# Altium PCB PCB2.PcbDoc (part 2 of 2)
Units mil, origin at the board's own origin, x right, y up, seen from the top; angles counter-clockwise.
Board outline 35165 x 15285 mil, 2 copper layers (Top Layer, Bottom Layer); 223 components, 120 nets, 681 pads, 228 vias.
Unrouted connection lines stored in the file: 6.
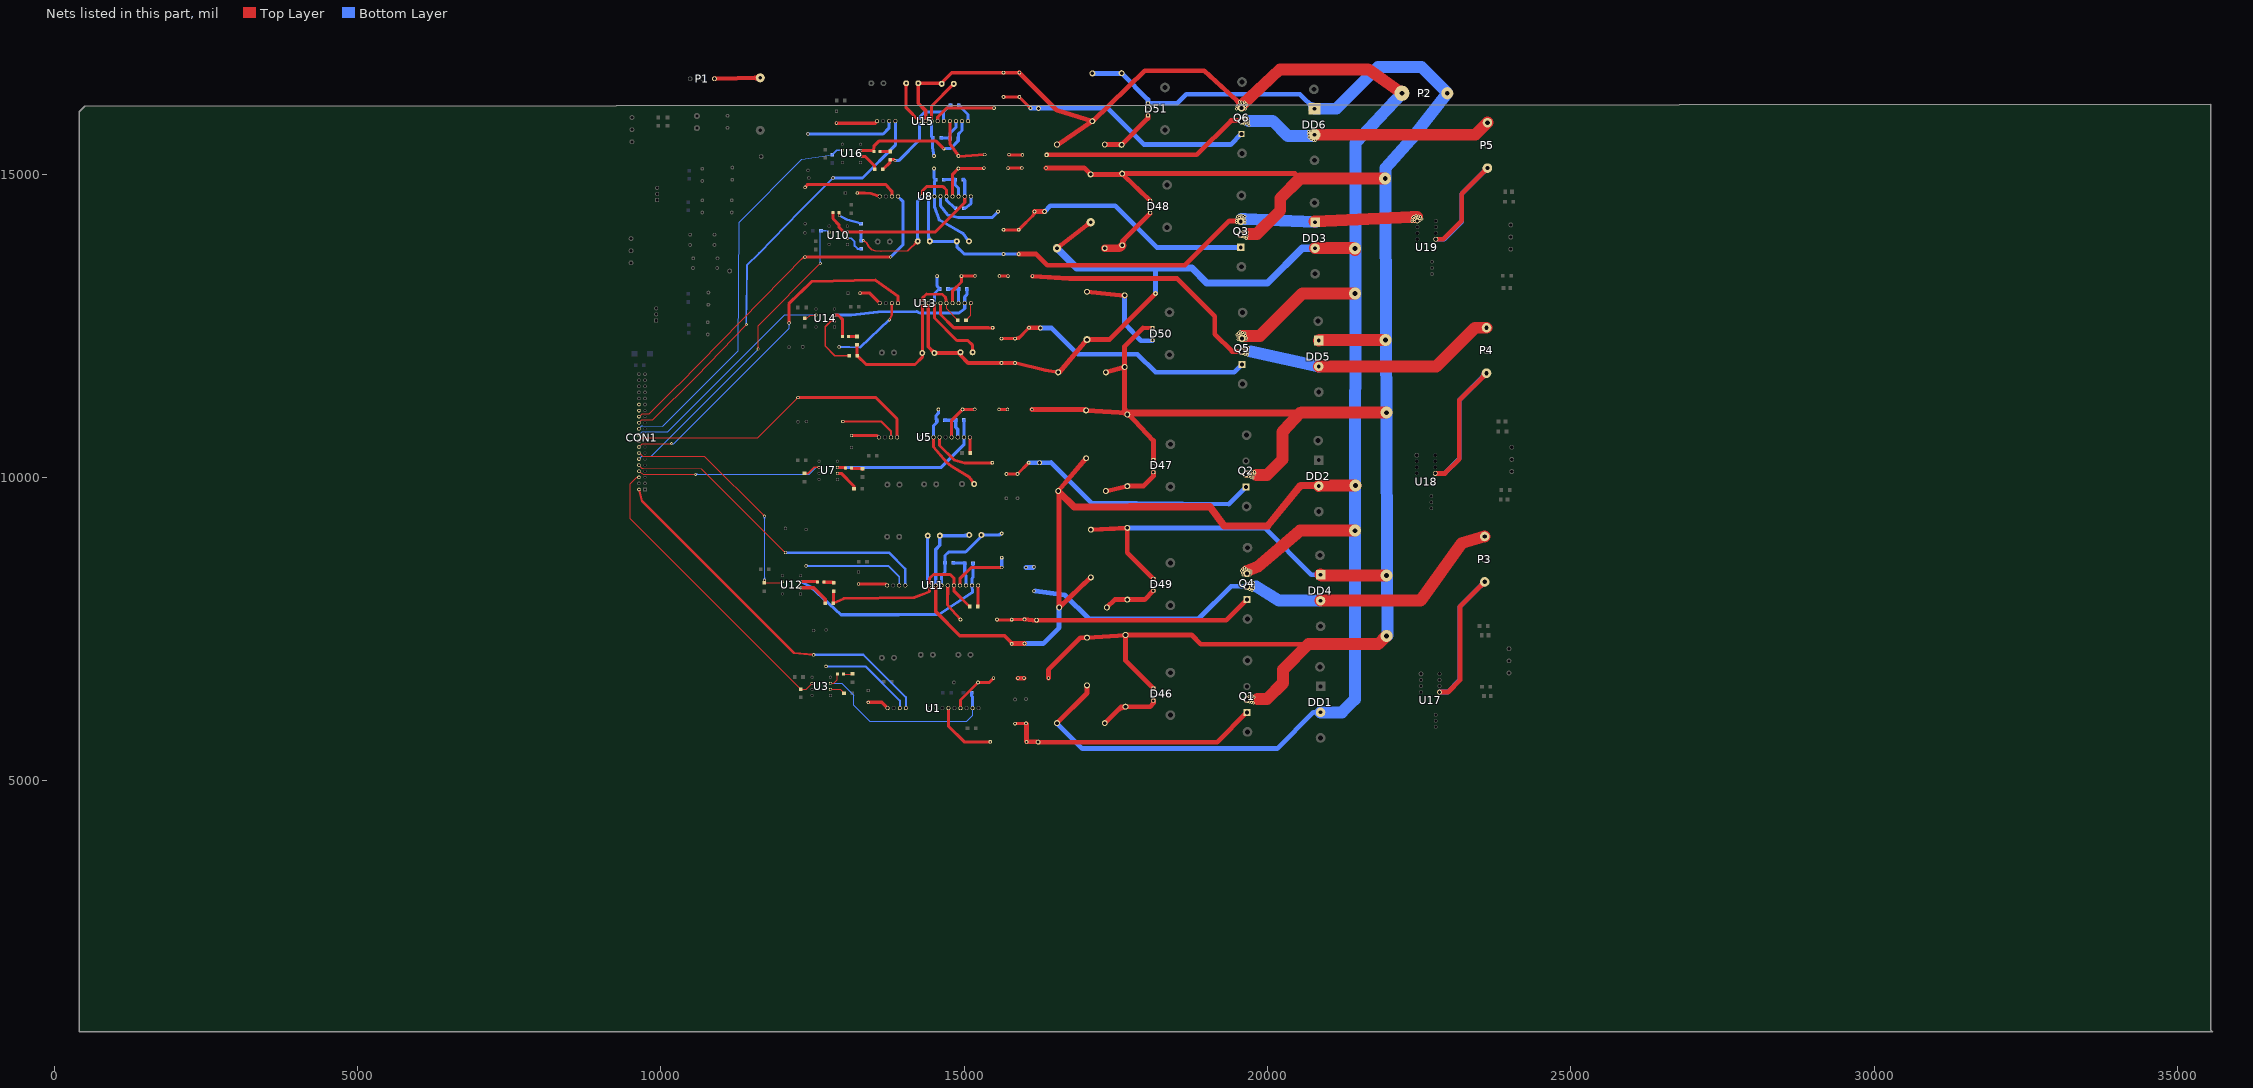
[diagram p2: the nets of this part, all layers, seen from the top]

## Via types
v1: diameter 50, hole 11.81, Top Layer to Bottom Layer, 181 vias
v2: diameter 50, hole 28, Top Layer to Bottom Layer, 18 vias
v3: diameter 70, hole 28, Top Layer to Bottom Layer, 12 vias
v4: diameter 196.85, hole 78.74, Top Layer to Bottom Layer, 9 vias
v5: diameter 157.48, hole 137.8, Top Layer to Bottom Layer, 4 vias
v6: diameter 50, hole 23.62, Top Layer to Bottom Layer, 2 vias
v7: diameter 78.74, hole 28, Top Layer to Bottom Layer, 1 vias
v8: diameter 86.61, hole 28, Top Layer to Bottom Layer, 1 vias

## Nets (pads, with @x,y where several pads share a name; then routed paths per layer and width w, separated by ;. In a path a pad name is that pad's centre, name@x,y a point inside that pad or via, vN(x,y) a via of type N, cw(c..) or ccw(c..) an arc to the next point about the centre after c; other vN are vias at no path point) (continued)
NetC22_2: C22.2 C24.1 D12.A U5.10 | length 1580.6
  Top Layer w50: U5.10@14495,10665 14495,10505 14710,10250 14790,10190 15085,10010 C22.2@15165,9895
  Bottom Layer w50: U5.10@14495,10665 14495,10855 14550,10910 C24.1@14550,10945 14540,10955 14540,11025 14575,11060 D12.A@14575,11125
NetC23_2: C23.2 U5.16 | length 262.1
  Top Layer w50: U5.16@15095,10665 15095,10410 C23.2@15100,10405
NetC24_2: C24.2 R16.2 U5.14 | length 476.6
  Bottom Layer w60: C24.2@14685,10945 14855,10945 R16.2@14860,10950 14860,10830 14895,10795 U5.14@14895,10665
NetC35_1: C35.1 C37.1 R27.2 R28.2 U8.8 U8.12 | length 3059.8
  Top Layer w30: v2(13345,13905) 13395,13870 13415,13830 13430.79,13805.12 13480.12,13755.79 13530,13740 13630,13730 14070,13740 C35.1@14235,13895 ; C35.1@14200.8,13896.07 cw(c14118.25,13898.65) 14174.8,13838.45 cw(c14231.35,13778.25) C35.1@14233.93,13860.8
  Top Layer w50: U8.8@14310,14635 14310,14725 14380,14795 14655,14795 14710,14740 U8.12@14710,14635
  Bottom Layer w50: R27.2@13300,14050 13300,13910 R28.2@13305,13905 ; C35.1@14217.88,13912.12 ccw(c14176.55,13953.45) 14235,13953.45 ccw(c14293.45,13953.45) C35.1@14252.12,13912.12 ; C35.1@14235,13895 14235,14560 U8.8@14310,14635 ; U8.12@14710,14635 14710,14570 C37.1@14845,14445
NetC35_2: C35.2 C36.1 D22.1 DD3.C Q3.3 R23.1 U8.9 U19.1 | length 9692.5
  Top Layer w50: Q3.3@19553.35,14230 Q3.3@19560,14223.35 ; DD3.C@20775,14220 DD3.C@20785,14210
  Top Layer w78.74: R23.1@15900,13685 16185,13685 16370,13500 18640,13500 19370,14230 Q3.3@19553.35,14230
  Top Layer w196.85: DD3.C@20775,14220 20784.51,14220.45 22376.41,14295.81 22377.83,14295.87 22389.46,14296.42 22410.36,14297.41 22416.32,14297.7 22417.98,14297.77 22439.11,14298.77 22450.98,14299.34 v1@22465,14300
  Bottom Layer w50: 14410,14013.81 ccw(c14553.81,14013.81) 14452.12,13912.12 ccw(c14493.45,13953.45) 14493.45,13895 ccw(c14493.45,13836.55) C35.2@14452.12,13877.88 ; U8.9@14410,14635 14410,13920 C35.2@14435,13895 C36.1@14880,13895 14880,13805 15000,13685 D22.1@15650,13685 R23.1@15890,13685 ; C36.1@14862.88,13912.12 cw(c14821.55,13953.45) 14821.55,13895 cw(c14821.55,13836.55) 14862.88,13877.88 cw(c14821.55,13836.55) 14880,13836.55 cw(c14938.45,13836.55) C36.1@14897.12,13877.88
  Bottom Layer w196.85: Q3.3@19575,14265 19597.45,14263.98 19609.25,14263.44 19623.08,14262.81 19630.93,14262.46 19632.84,14262.37 DD3.C@20785,14210
  other v1: 19630,14200 19490,14205 22380,14220 22420,14220 22515,14235 19490,14240 19630,14242.05 22380,14250 22420,14255 22545,14265 19500,14270 22510,14270 19610,14280 22440,14280 22390,14285 22480,14285 19535,14290 19575,14295 19505,14300 22525,14300 19625,14305 22410,14305 22490,14315 19530,14320 19600,14320 22450,14320 19565,14330
NetC36_2: C36.2 C38.1 D23.A U8.10 | length 1492.5
  Bottom Layer w50: D23.A@14505,15095 14505,14935 C38.1@14530,14910 14510,14890 U8.10@14510,14635 14510,14465 14590,14250 14975,14030 C36.2@15080,13895
NetC37_2: C37.2 U8.16 | length 252
  Bottom Layer w50: C37.2@15005,14435 15110,14515 U8.16@15110,14635
NetC38_2: C38.2 R29.2 U8.14 | length 491.1
  Bottom Layer w50: C38.2@14665,14910 14835,14910 R29.2@14850,14925 ; R29.2@14850,14910 14850,14825 14910,14765 U8.14@14910,14635
NetC44_1: C44.1 C46.1 R35.2 R36.2 U11.8 U11.12 | length 3994.2
  Top Layer w50: R35.2@12850,8130 12850,7935 R36.2@12845,7930 13015,8005 14180,8025 14430,8120 U11.8@14430,8225 14430,8340 14495,8405 14770,8405 14830,8345 U11.12@14830,8225 14830,8135 C46.1@15090,7875
  Bottom Layer w50: C44.1@14382.88,9027.88 cw(c14341.55,8986.55) 14400,8986.55 cw(c14458.45,8986.55) C44.1@14417.12,9027.88 ; C44.1@14400,9045 14400,8255 U11.8@14430,8225
NetC44_2: C44.2 C45.1 C51.2 C52.1 C58.2 C59.1 C63.1 C64.1 C65.1 C68.1 C69.1 C70.1 C71.1 C72.1 C73.1 C74.1 C75.1 C76.1 D29.1 D36.1 D42.1 DD1.A DD2.A DD3.A P2.3 Q4.3 Q5.3 Q6.3 R32.1 R40.1 R47.1 U11.9 U13.9 U15.9 | length 57119.9
  Top Layer w60: U15.9@14365,15875 14365,16050 14245,16170 C58.2@14245,16500 14620,16500 C59.1@14630,16490 14630,16510 14795,16675 D42.1@15650,16675 R47.1@15910,16675 ; U13.9@14410,12875 14410,12155 C51.2@14510,12055 14930,12055 C52.1@14940,12065 14940,12015 15065,11890 R40.1@15615,11890 D36.1@15840,11890 16340,11770 C71.1@16550,11735 ; U11.9@14530,8225 14535,7975 14535,7790 14930,7395 15665,7395 15785,7275 R32.1@15785,7260 R32.1@15790,7265 ; 14869.47,12055 ccw(c14869.47,12135.53) C52.1@14926.41,12078.59 ; C73.1@17115,15875 C73.1@17123.75,15875
  Top Layer w78.74: R32.1@15790,7265 D29.1@15995,7265 ; R47.1@15910,16675 16530,16055 C73.1@17115,15875 C74.1@16540,15480 ; C64.1@16530,5955 17025,6450 C63.1@17025,6575 ; C68.1@16530,13780 C76.1@17085,14210 ; C68.1@16533.72,13809.29 ccw(c16542.69,13880.01) 16586.35,13823.66 ccw(c16630.01,13767.31) C68.1@16559.29,13776.28 ; C75.1@16543.04,9773.04 cw(c16490.02,9720.02) 16565,9720.02 ; C71.1@16549.16,11744.81 ccw(c16542.69,11820.51) 16600.8,11771.55 ; C71.1@16570,11735 C72.1@17025,12275 17395,12275 v8(18155,13035) ; C65.1@17010,10320 C75.1@16550,9780 16565,9765 C70.1@16565,7860 C69.1@17090,8355 ; C76.1@17055.71,14213.72 cw(c16984.99,14222.69) 17028.65,14166.34 cw(c17072.31,14109.99) C76.1@17081.28,14180.71 ; C73.1@17123.75,15875 17980,16705 18958.35,16705 Q6.3@19580,16140 ; 17720,9515 17725,9520 ; 19487.19,16224.35 cw(c19358.97,16083.27) Q6.3@19549.39,16092.36
  Top Layer w118.11: C75.1@16565,9765 16815,9515 17720,9515 ; 17725,9520 19055,9520 19285,9205 20005,9205 20545,9870 DD2.A@20853.35,9870
  Top Layer w196.85: Q6.3@19580,16140 20206.65,16730 21660,16730 22215.98,16336.39 P2.3@22225,16330 ; Q5.3@19595,12335 19875,12335 20575,13035 v4(21440,13035) ; Q4.3@19660,8460 19845,8535 20535,9125 v4(21440,9125) ; DD3.A@20785,13781.65 21413.35,13781.65 21440,13755 v4(21440,13775) ; DD2.A@20845,9861.65 20853.35,9870 v4(21450,9870)
  Bottom Layer w60: U11.9@14530,8225 14530,8815 14600,8885 C44.2@14600,9045 15075,9045 C45.1@15085,9055 ; 15014.47,9045 ccw(c15014.47,9125.53) C45.1@15071.41,9068.59
  Bottom Layer w78.74: D29.1@15995,7265 16305,7265 16565,7525 C70.1@16565,7860 ; C64.1@16530,5955 16950,5535 20160,5535 20756.65,6131.65 DD1.A@20875,6131.65 ; v8(18155,13035) 18155,13455 ; DD1.A@20847.16,6103.81 ccw(c20779.95,6036.61) 20779.95,6131.65 ccw(c20779.95,6226.7) DD1.A@20847.16,6159.49
  Bottom Layer w118.11: C68.1@16530,13780 16855,13455 18155,13455 18755,13455 19000,13210 20000,13210 20571.65,13781.65 DD3.A@20785,13781.65
  Bottom Layer w196.85: DD1.A@20875,6131.65 21226.65,6131.65 21440,6345 21440,7175 21442.34,9125 21443.23,9870.01 21447.03,13034.99 21447.89,13754.99 21450,15515 P2.3@22215,16335
  other v1: 19600,8395 19715,8395 19730,8425 19585,8430 19595,8455 19725,8460 19570,8465 19625,8475 19695,8480 19590,8495 19655,8495 19620,8515 19645,12265 19515,12280 19650,12300 19510,12320 19635,12340 19530,12345 19500,12355 19600,12360 19560,12365 19525,12380 19625,12385 19585,12390 19550,12405 19635,16075 19490,16080 19495,16115 19640,16115 19665,16140 19520,16145 19620,16145 19645,16165 19550,16170 19590,16170 19575,16190 19620,16190 19540,16195
NetC45_2: C45.2 C47.1 D30.A U11.10 | length 1780.9
  Bottom Layer w50: U11.10@14630,8225 14630,8390 14685,8445 C47.1@14685,8595 14685,8715 14745,8775 15025,8775 15285,9035 C45.2@15285,9055 15595,9055 D30.A@15620,9080 ; C45.2@15302.12,9037.88 cw(c15343.45,8996.55) 15343.45,9055 cw(c15343.45,9113.45) C45.2@15302.12,9072.12 ; 15545.16,9055 ccw(c15545.16,9154.84) D30.A@15615.76,9084.24
NetC46_2: C46.2 U11.16 | length 352.1
  Top Layer w50: C46.2@15225,7875 15230,7880 U11.16@15230,8225
NetC47_2: C47.2 R37.2 U11.14 | length 564.1
  Bottom Layer w50: C47.2@14820,8595 15005,8595 R37.2@15010,8590 15010,8415 15030,8390 U11.14@15030,8225
NetC51_1: C51.1 C53.1 R42.2 R43.2 U13.8 U13.12 | length 3218
  Top Layer w20: U13.12@14710,12875 14710,12785 C53.1@14895,12595
  Top Layer w50: R42.2@13235,12190 13235,12015 R43.2@13240,12010 13385,11865 14190,11865 14310,11985 C51.1@14310,12055 U13.8@14310,12875 14310,12955 14380,13025 14645,13020 14695,12970 U13.12@14710,12875
NetC52_2: C52.2 C54.1 D37.A U13.10 | length 1777.9
  Top Layer w50: U13.10@14510,12875 14510,12630 14880,12260 15060,12260 15140,12180 C52.2@15140,12065 ; C52.2@15122.88,12082.12 ccw(c15081.55,12123.45) 15140,12123.45 ccw(c15198.45,12123.45) C52.2@15157.12,12082.12
  Bottom Layer w50: U13.10@14510,12875 14510,13035 14585,13110 C54.1@14600,13110 14555,13155 D37.A@14555,13320
NetC53_2: C53.2 U13.16 | length 323.8
  Top Layer w20: C53.2@15025,12585 15110,12675 U13.16@15110,12875
NetC54_2: C54.2 R44.2 U13.14 | length 416.2
  Bottom Layer w50: C54.2@14735,13110 14895,13110 R44.2@14910,13125 ; U13.14@14910,12875 R44.2@14910,13110
NetC58_1: C58.1 C60.1 R49.2 R50.2 U15.8 U15.12 | length 2766.7
  Top Layer w50: R50.2@13660,15080 13780,15200 R49.2@13780,15240 13845,15240 v2(13860,15225) ; C58.1@14027.88,16482.88 cw(c13986.55,16441.55) 14045,16441.55 cw(c14103.45,16441.55) C58.1@14062.12,16482.88 ; C58.1@14045,16500 14045,16095 U15.8@14265,15875
  Bottom Layer w50: v2(13860,15225) 13920,15225 14265,15570 U15.8@14265,15875 14265,15940 14350,16025 14660,16025 ; U15.12@14665,15875 14660,15880 14660,16025 ; C60.1@14775,16140 14660,16025
NetC59_2: C59.2 C61.1 D43.A U15.10 | length 1354.9
  Top Layer w50: U15.10@14465,15875 14465,16125 C59.2@14830,16490
  Bottom Layer w50: U15.10@14465,15875 14465,15620 C61.1@14485,15600 14480,15595 14480,15500 14475,15440 D43.A@14505,15300
NetC60_2: C60.2 U15.16 | length 329.2
  Bottom Layer w50: C60.2@14910,16140 15065,15985 U15.16@15065,15875
NetC61_2: C61.2 R51.2 U15.14 | length 478.5
  Bottom Layer w50: C61.2@14620,15600 14760,15600 R51.2@14770,15590 14770,15680 14865,15775 U15.14@14865,15875
NetC63_2: C63.2 C65.2 C69.2 C71.2 C73.2 C76.2 D2.2 D10.2 D20.2 D46.1 D47.1 D48.1 D49.1 D50.1 D51.1 DD4.C DD5.C DD6.C P2.1 Q1.2 Q2.2 Q3.2 R53.2 R54.2 R55.2 R56.2 R57.2 R58.2 | length 51052.1
  Top Layer w66.93: 17945,12465 D50.1@18105,12465
  Top Layer w68.9: 17645,11111.1 R54.2@17690,11066.1 ; 17647.12,11108.98 cw(c17579.24,11041.1) R54.2@17675.24,11041.1
  Top Layer w78.74: D10.2@16115,11125 16992.4,11125 C65.2@17010,11107.4 17020,11108.27 17688.98,11066.06 17690,11066.1 17702.48,11052.9 18120,10611.1 D47.1@18120,10290 ; D20.2@16350,15105 16977.4,15105 C76.2@17085,14997.4 R55.2@17591.3,14997.4 ; D2.2@16390,6695 16390,6835 16917.4,7362.4 C63.2@17025,7362.4 R53.2@17660,7404.02 ; 16943.75,11125 cw(c16943.75,11041.15) C65.2@17003.04,11100.44 ; C69.2@17090,9142.4 R56.2@17690,9171.1 17690,8765 D49.1@18120,8335 ; C71.2@17337.4,11735 R57.2@17645,11823.9 ; 17548.16,14997.4 ccw(c17548.16,15067.94) R55.2@17598.04,15018.06 ; R58.2@17591.3,16662.4 R58.2@17595,16666.1 ; R55.2@17595,15015 17602.16,15008.14 D48.1@18065,14565 ; R55.2@17605,15011.1 20453.9,15011.1 20535,14930 ; 17607.99,11071.17 cw(c17601.15,10962.8) R54.2@17682.62,11034.59 ; 17645,11173.5 ccw(c17822.4,11173.5) R54.2@17696.96,11048.06 ; R53.2@17675,7405 17660.14,7404.03 R53.2@17660,7404.02 ; R54.2@17689.72,11031.26 cw(c17687.4,10948.91) 17747.28,11005.5 ; R54.2@17692.35,11050.66 cw(c17707.25,11111.1) 17645,11111.1 R57.2@17645,11823.9 ; 17945,12465 17645,12165 R57.2@17645,11823.9 ; D46.1@18120,6525 17660,6985 R53.2@17660,7404.02 ; 20536.1,11066.1 20565,11070 ; 20675,7255 18900,7255 18748.9,7406.1 R53.2@17660,7406.1 R53.2@17660,7404.02
  Top Layer w118.11: R54.2@17690,11066.1 20536.1,11066.1 ; Q3.2@19560,14009.17 v1@19670,14010 ; Q2.2@19645,10059.17 v1@19790,10050 ; Q1.2@19660,6344.17 19820,6345
  Top Layer w196.85: 19695,14015 19825,14015 20210,14400 20210,14605 20535,14930 v4(21940,14930) ; 19820,10045 19995,10045 20250,10300 20250,10755 20536.1,11066.1 ; 19835,6350 19990,6350 20255,6615 20255,6835 20675,7255 21825,7255 v4(21960,7390) ; 20565,11070 v4(21960,11070) ; DD5.C@20845,12260 20855,12270 v4(21945,12270) ; DD4.C@20875,8400 20890,8385 v4(21960,8385)
  Bottom Layer w78.74: C73.2@17115,16662.4 R58.2@17591.3,16662.4 ; R58.2@17595,16666.1 18030,16231.1 D51.1@18030,16170 18510,16170 18660,16320 20535,16320 DD6.C@20775,16080 ; R56.2@17690,9171.1 19953.9,9171.1 20725,8400 DD4.C@20875,8400 ; DD6.C@20715.94,16080 ccw(c20573.37,16080) 20674.19,16180.81 ccw(c20775,16281.63) DD6.C@20775,16139.06 ; DD4.C@20847.16,8372.16 ccw(c20779.95,8304.95) 20779.95,8400 ccw(c20779.95,8495.05) DD4.C@20847.16,8427.84
  Bottom Layer w196.85: DD6.C@20775,16080 21135,16080 21820,16765 22540,16765 22963.03,16341.97 P2.1@22963.03,16335 22430,15650 21945,15105 21945.45,14930.01 21954.44,12270.03 21958.5,11069.99 21967.58,8385.03 v4@21975,7400
  other v1: 19770,6285 19735,6295 19705,6300 19750,6324.69 19720,6330 19750,6355 19715,6365 19780,6380 19695,6390 19725,6395 19750,6400 19760,9995 19725,10000 19690,10015 19740,10025 19710,10034.43 19775,10040 19750,10060 19715,10070 19790,10080 19685,10100 19755,10100 19785,10100 19720,10105 19650,13945 19610,13965 19660,13975 19630,13990 19660,14010 19625,14025 19660,14045 19600,14055 19635,14070
NetC64_2: C64.2 D46.3 R53.1 | length 1138.5
  Top Layer w78.74: C64.2@17317.4,5955 17587.4,6225 R53.1@17660,6225 18065,6225 18120,6280 D46.3@18120,6325 ; 17519.26,6156.86 cw(c17660,6016.13) R53.1@17660,6215.16
NetC68_2: C68.2 D48.3 R55.1 | length 1363.6
  Top Layer w78.74: R55.1@17605,13830 17605,13894.94 D48.3@18065,14354.94 ; R55.1@17614.84,13830 cw(c17795.4,13830) 17667.73,13957.67
  Top Layer w118.11: C68.2@17317.4,13780 17555,13780 ; 17508.05,13780 ccw(c17508.05,13926.95) R55.1@17611.96,13823.04 ; R55.1@17605,13830 17555,13780 ; R55.1@17614.61,13827.88 cw(c17555,13841.05) 17555,13780
NetC70_2: C70.2 D49.3 R56.1 | length 881.5
  Top Layer w78.74: C70.2@17352.4,7860 17482.4,7990 R56.1@17690,7990 17975,7990 D49.3@18120,8135
NetC72_2: C72.2 D50.3 R57.1 | length 1688.8
  Top Layer w50: R57.1@17645,13005 R57.1@17650,12995
  Top Layer w78.74: C72.2@17025,13062.4 17643.99,12995.65 R57.1@17650,12995
  Bottom Layer w78.74: R57.1@17645,13005 17645,12535 17915,12255 D50.3@18105,12255
NetC74_2: C74.2 D51.3 R58.1 | length 944.9
  Top Layer w50: R58.1@17590,15490 R58.1@17595,15485
  Top Layer w78.74: C74.2@17317.4,15490 R58.1@17590,15490 ; R58.1@17595,15485 18030,15920 D51.3@18030,15970
NetC75_2: C75.2 D47.3 R54.1 | length 945.5
  Top Layer w78.74: C75.2@17327.4,9775 17337.99,9777.42 17690.49,9857.83 R54.1@17700,9860 ; R54.1@17690,9860 R54.1@17700,9860 ; D47.3@18120,10090 18120,10025 17955,9860 R54.1@17700,9860
NetCON1_2: CON1.2 D6.1 U1.4 | length 6055.4
  Top Layer w35: CON1.2@9640,9805 9690,9615 12195,7110 D6.1@12520,7080
  Bottom Layer w35: D6.1@12520,7080 13340,7080 14040,6380 U1.4@14040,6200
NetCON1_6: CON1.6 R8.1 U3.6 | length 4959.7
  Top Layer w20: CON1.6@9640,10005 9605,10005 9500,9900 9500,9320 R8.1@12305,6515 12400,6515 U3.6@12495,6610
NetCON1_8: CON1.8 R17.1 U7.6 | length 3381.4
  Top Layer w15: CON1.8@9640,10105 9710,10055 v2(10570,10055)
  Top Layer w30: R17.1@12370,10070 12430,10070 12530,10170 U7.6@12610,10170
  Bottom Layer w15: v2(10570,10055) 12445,10055 12560,10170 U7.6@12610,10170 ; v2@10582.37,10042.63 cw(c10612.25,10012.75) 10612.25,10055 cw(c10612.25,10097.25) v2@10582.37,10067.37
NetCON1_10: CON1.10 D32.1 U11.4 | length 5366.2
  Top Layer w20: CON1.10@9640,10205 9690,10155 9710,10155 10670,10150 D32.1@12055,8765
  Bottom Layer w40: D32.1@12055,8765 13760,8765 14030,8495 U11.4@14030,8225
NetCON1_12: CON1.12 R30.1 U10.6 | length 5355.6
  Top Layer w20: v2@11594.39,12130.61 ccw(c11568.79,12156.21) 11605,12156.21 ccw(c11641.21,12156.21) v2@11615.61,12130.61 ; v2@11605,12115 11605,12505 v2(12630,13530)
  Bottom Layer w20: CON1.12@9640,10305 9690,10355 9850,10360 v2@11605,12115 ; v2@12619.39,13540.61 ccw(c12593.79,13566.21) 12630,13566.21 ccw(c12666.21,13566.21) v2@12640.61,13540.61 ; v2(12630,13530) R30.1@12630,14060
  Bottom Layer w30: R30.1@12630,14060 R30.1@12640,14070 12750,14070 U10.6@12775,14045
  other v2: 11605,12120
NetCON1_14: CON1.14 R38.1 U12.6 | length 4196.7
  Top Layer w20: CON1.14@9640,10405 9650,10405 9700,10355 10720,10355 v2(11710,9365) ; R38.1@11694.43,8281.98 ccw(c11677,8310) v2(11710,8310) 11710,8270 R38.1@11705,8265 11985,8265 U12.6@12005,8285 ; v2@11695,9365 ccw(c11658.79,9365) 11684.39,9390.61 ccw(c11710,9416.21) v2@11710,9380 ; v2@11699.39,8299.39 cw(c11673.79,8273.79) 11710,8273.79 cw(c11746.21,8273.79) v2@11720.61,8299.39 ; v2@11710,8301.21 ccw(c11741.21,8301.21) R38.1@11719.14,8279.14
  Bottom Layer w20: v2@11699.39,8320.61 ccw(c11673.79,8346.21) 11710,8346.21 ccw(c11746.21,8346.21) v2@11720.61,8320.61 ; v2@11699.39,9354.39 cw(c11673.79,9328.79) 11710,9328.79 cw(c11746.21,9328.79) v2@11720.61,9354.39 ; v2(11710,8310) v2(11710,9365)
NetCON1_16: CON1.16 D38.1 U13.4 | length 5903.7
  Top Layer w20: CON1.16@9640,10505 9694.97,10554.97 9840,10555 10175,10555 v2(10180,10560)
  Top Layer w50: D38.1@12115,12550 12110,12865 12485,13230 13540,13255 13910,12990 U13.4@13910,12875
  Bottom Layer w20: v2(10180,10560) 10215,10560 12115,12460 D38.1@12115,12550 ; D38.1@12102.58,12537.58 cw(c12072.61,12507.61) 12115,12507.61 cw(c12157.39,12507.61) D38.1@12127.42,12537.58
NetCON1_18: CON1.18 D15.1 U5.4 | length 5067.7
  Top Layer w15: CON1.18@9640,10605 CON1.18@9645,10605
  Top Layer w20: CON1.18@9645,10605 9695,10655 11595,10655 D15.1@12260,11320 ; D15.1@12242.44,11320 cw(c12200.05,11320) 12230.02,11290.02 cw(c12260,11260.05) D15.1@12260,11302.44
  Top Layer w50: D15.1@12260,11320 13545,11320 13895,10970 U5.4@13895,10665
NetCON1_20: CON1.20 R45.1 U14.6 | length 3950
  Top Layer w20: R45.1@12375,12625 12410,12625 12465,12680 U14.6@12560,12680
  Bottom Layer w15: CON1.20@9640,10705 CON1.20@9645,10705
  Bottom Layer w20: CON1.20@9645,10705 9695,10755 10115,10755 12045,12685 12555,12685 U14.6@12560,12680
NetCON1_22: CON1.22 R52.1 U16.6 | length 6461.8
  Bottom Layer w20: CON1.22@9640,10805 9690,10855 9700,10855 10035,10850 11280,12095 11290,14210 12325,15245 R52.1@12825,15320
  Bottom Layer w30: R52.1@12825,15320 12900,15395 U16.6@12995,15395
NetCON1_24: CON1.24 D44.1 U15.4 | length 7141.6
  Top Layer w20: CON1.24@9640,10905 9690,10955 9700,10955 9866.8,10951.8 10595,11675 v2(11410,12520)
  Bottom Layer w30: v2(11410,12520) 11420,13500 11620,13700 12290,14390 D44.1@12840,14940 ; D44.1@12827.44,14940 cw(c12797.12,14940) 12818.56,14918.56 cw(c12840,14897.12) D44.1@12840,14927.44
  Bottom Layer w50: D44.1@12840,14940 13325,14940 13865,15480 U15.4@13865,15875
NetCON1_26: CON1.26 D25.1 U8.4 | length 6464.8
  Top Layer w20: CON1.26@9640,11005 9645,11005 9695,11055 9810.03,11055.03 10280,11520 10295,11530 D25.1@12365,13645 ; 12311.36,13590.2 cw(c12376.16,13526.77) D25.1@12375.19,13617.44 ; 12345.14,13624.7 cw(c12375.43,13595.05) D25.1@12374.97,13637.44
  Top Layer w50: D25.1@12375,13635 v2(13790,13635)
  Bottom Layer w50: v2(13790,13635) 13990,13835 13990,14555 U8.4@13910,14635
NetCON1_28: CON1.28
NetCON1_30: CON1.30
NetD1_1: D1.1 D4.K U1.13 | length 829.1
  Top Layer w50: U1.13@14940,6200 14940,6335 D4.K@15230,6625 15415,6625 D1.1@15485,6695
NetD1_2: D1.2 D2.1 | length 105
  Top Layer w78.74: D1.2@15885,6695 D2.1@15990,6695
NetD3_2: D3.2 pad.0@16220,5640 Q1.1 R1.2 R2.2 | length 4326.2
  Top Layer w50: D3.2@15840,5945 15845,5950 R2.2@16020,5950 R2.2@16030,5940
  Top Layer w78.74: R2.2@16030,5940 R1.2@16030,5645 16215,5645 pad.0@16220,5640 19170,5640 Q1.1@19660,6130
NetD7_A: D7.A R5.1 | length 148.8
  Top Layer w20: D7.A@13012,6763 13158,6763 R5.1@13160,6765
NetD7_K: D7.K R7.1 U1.15 U3.3 | length 3348.9
  Top Layer w20: U3.3@12795,6610 12850,6610 12912,6672 D7.K@12912,6763
  Bottom Layer w20: U3.3@12795,6610 12980,6610 13180,6410 13180,6250 13445,5985 15040,5985 15140,6085 U1.15@15140,6200
  Bottom Layer w50: R7.1@15125,6455 15125,6400 15140,6385 U1.15@15140,6200
NetD9_1: D9.1 D12.K U5.13 | length 734.6
  Top Layer w50: U5.13@14795,10665 14795,10945 D12.K@14975,11125 D9.1@15175,11125
NetD9_2: D9.2 D10.1 | length 140
  Top Layer w50: D9.2@15575,11125 D10.1@15715,11125
NetD11_2: D11.2 pad.0@16245,10245 Q2.1 R10.2 R11.2 | length 4423.1
  Top Layer w50: D11.2@15695,10060 R11.2@15880,10060 R10.2@16065,10245
  Bottom Layer w78.74: R10.2@16065,10245 pad.0@16245,10245 16435,10248.96 17100,9580 19360,9560 Q2.1@19645,9845
NetD16_A: D16.A R13.1 | length 185.5
  Top Layer w50: D16.A@13147,10153 13307,10153 R13.1@13325,10135
NetD16_K: D16.K R16.1 U5.15 U7.3 | length 2792.3
  Top Layer w50: U7.3@12910,10170 13030,10170 D16.K@13047,10153
  Bottom Layer w50: U7.3@12910,10170 14625,10170 14995,10540 U5.15@14995,10665 R16.1@14995,10950
NetD19_1: D19.1 D23.K U8.13 | length 921.4
  Top Layer w50: U8.13@14810,14635 14810,15000 D23.K@14905,15095 15320,15095 D19.1@15325,15100
NetD19_2: D19.2 D20.1 | length 227.1
  Top Layer w50: D19.2@15725,15100 15945,15100 D20.1@15950,15105
NetD22_2: D22.2 pad.0@16325,14385 Q3.1 R19.2 R23.2 | length 4468
  Top Layer w50: D22.2@15650,14085 R23.2@15900,14085 16160,14345 R19.2@16160,14385 ; 16121.47,14306.47 ccw(c16042.95,14385) R19.2@16154,14385
  Top Layer w78.74: R19.2@16160,14385 pad.0@16325,14385
  Bottom Layer w78.74: pad.0@16325,14385 16420,14480 17490,14480 18175,13795 Q3.1@19560,13795
NetD26_A: D26.A R27.1 | length 425.7
  Top Layer w40: D26.A@12937,14368 12937,14328 v2(12945,14320)
  Bottom Layer w40: v2(12945,14320) 13075,14250 R27.1@13295,14195
NetD26_K: D26.K R29.1 U8.15 U10.3 | length 2992.1
  Top Layer w50: D26.K@12837,14368 12837,14268 12935,14170 12935,14130 13020,14045 U10.3@13075,14045 14520,14045 15010,14535 U8.15@15010,14635
  Bottom Layer w50: R29.1@14985,14925 15010,14900 U8.15@15010,14635
NetD27_1: D27.1 D30.K U11.13 | length 1036.6
  Top Layer w50: U11.13@14930,8225 14930,8335 15115,8520 D27.1@15620,8520
  Bottom Layer w50: D27.1@15620,8520 D30.K@15620,8680
NetD27_2: D27.2 D28.1 | length 115
  Bottom Layer w78.74: D27.2@16020,8520 D28.1@16135,8520
NetD28_2: D28.2 DD4.A P3.3 Q4.2 | length 8415.6
  Top Layer w196.85: DD4.A@20875,7971.65 22521.65,7971.65 23195,8915 P3.3@23580,9030
  Bottom Layer w78.74: D28.2@16175,8130 16655,8065.24 17060,7670 18860,7670 19400,8210 Q4.2@19665.83,8210 ; 19598.41,8210 cw(c19598.41,8142.58) Q4.2@19646.08,8190.25
  Bottom Layer w118.11: Q4.2@19665.83,8210 19673.48,8209.74 19703.62,8208.73 19706.8,8208.63 19729.76,8207.86 19730.93,8207.82 19733.25,8207.74 19747.25,8207.27 19762.88,8206.75 19764.22,8206.7 19765.22,8206.67 19766.23,8206.63 19815,8205
  Bottom Layer w196.85: 19815,8205 20193.35,7971.65 DD4.A@20875,7971.65
  other v1: 19745,8140 19705,8155 19765,8170 19730,8180 19765,8200 19730,8215 19765,8230 19705,8250 19675,8255 19735,8260 19765,8270
NetD29_2: D29.2 pad.0@16195,7650 Q4.1 R31.2 R32.2 | length 4264.5
  Top Layer w50: R31.2@15540,7655 R32.2@15785,7655 ; R32.2@15785,7660 15990,7660 D29.2@15995,7665
  Top Layer w78.74: D29.2@15995,7665 16193.77,7640.15 pad.0@16195,7640 ; pad.0@16195,7650 19320,7650 Q4.1@19660,7990
NetD33_A: D33.A R35.1 | length 168.4
  Top Layer w60: D33.A@12687,8278 12837,8278 R35.1@12850,8265
NetD33_K: D33.K R37.1 U11.15 U12.3 | length 3912.2
  Top Layer w50: U12.3@12305,8285 12580,8285 D33.K@12587,8278
  Bottom Layer w50: U12.3@12305,8285 12470,8200 12970,7740 13925,7740 14590,7745 15135,8110 U11.15@15130,8225 15130,8340 15145,8355 R37.1@15145,8590
NetD34_1: D34.1 D37.K U13.13 | length 725.1
  Top Layer w50: U13.13@14810,12875 14810,13080 14955,13225 D37.K@14955,13320 D34.1@15175,13320
NetD34_2: D34.2 D35.1 | length 147.1
  Top Layer w50: D34.2@15580,13325 15720,13325 D35.1@15725,13320
NetD35_2: D35.2 DD5.A P4.3 Q5.2 | length 8428.3
  Top Layer w78.74: D35.2@16125,13320 16735,13280 18510,13280 19130,12660 19130,12365 19415.83,12079.17 Q5.2@19580,12079.17
  Top Layer w196.85: DD5.A@20845,11831.65 22781.65,11831.65 23420,12470 P4.3@23610,12470
  Bottom Layer w118.11: Q5.2@19580,12079.17 19610.32,12079.37 19629.69,12079.49 19630.23,12079.49 19639.84,12079.55 19645.07,12079.59 19650.35,12079.62 19669.62,12079.74 19675.13,12079.78 19679.87,12079.81 19685.41,12079.84 19710,12080
  Bottom Layer w196.85: 19730,12080 DD5.A@20845,11831.65
  other v1: 19670,12020 19630,12030 19640,12055 19680,12060 19645,12090 19675,12100 19630,12115 19610,12130 19650,12135 19685,12145
NetD36_2: D36.2 pad.0@16255,12465 Q5.1 R39.2 R40.2 | length 4504
  Top Layer w50: R40.2@15615,12290 D36.2@15840,12290 15890,12290 R39.2@16070,12470 ; D36.2@15840,12296 ccw(c15840,12431.2) 15935.6,12335.6 ; pad.0@16250,12470 pad.0@16255,12465
  Top Layer w78.74: R39.2@16070,12470 pad.0@16250,12470
  Bottom Layer w78.74: pad.0@16255,12465 16445,12465 16875,12035 17855.63,12035 18155.63,11735 19450,11735 Q5.1@19580,11865
NetD39_A: D39.A R42.1 | length 139.2
  Top Layer w50: D39.A@13097,12328 13232,12328 R42.1@13235,12325
NetD39_K: D39.K R44.1 U13.15 U14.3 | length 2967.5
  Top Layer w50: U14.3@12860,12680 12920,12680 12997,12603 D39.K@12997,12328
  Bottom Layer w50: U14.3@12860,12680 13145,12680 13580,12730 14215,12740 14275,12710 14645,12710 14905,12710 15010,12785 U13.15@15010,12875 15010,12980 15045,13015 R44.1@15045,13110
NetD40_1: D40.1 D43.K U15.13 | length 1053.2
  Top Layer w50: U15.13@14765,15875 14765,15510 14915,15295 D40.1@15340,15325
NetD40_2: D40.2 D41.1 | length 225
  Top Layer w50: D40.2@15735,15320 D41.1@15960,15320
NetD41_2: D41.2 DD6.A P5.3 Q6.2 | length 7748.2
  Top Layer w78.74: D41.2@16360,15320 18835,15320 19400,15885 Q6.2@19564.17,15885 ; 19506.13,15885 cw(c19506.13,15815.3) Q6.2@19555.41,15864.59 ; DD6.A@20753.35,15630 DD6.A@20775,15651.65
  Top Layer w196.85: DD6.A@20775,15651.65 23426.65,15651.65 P5.3@23625,15850
  Bottom Layer w118.11: Q6.2@19564.17,15885 v1@19695,15880
  Bottom Layer w196.85: v1@19695,15880 20085.83,15879.17 20335,15630 DD6.A@20753.35,15630
  other v1: 20755,15555 20795,15560 20715,15570 20685,15610 20680,15660 20675,15705 20720,15710 19695,15800 19660,15825 19620,15830 19690,15845 19645,15865 19685,15880 19645,15905 19680,15920 19615,15935 19655,15950
NetD42_2: D42.2 pad.0@16225,16085 Q6.1 R46.2 R47.2 | length 4317.6
  Top Layer w50: D42.2@15650,16275 R47.2@15910,16275 R46.2@16095,16090
  Bottom Layer w78.74: R46.2@16095,16090 17365,16090 17965,15490 19395,15490 Q6.1@19570,15665
NetD45_A: D45.A R49.1 | length 169.2
  Top Layer w50: D45.A@13612,15378 13777,15378 R49.1@13780,15375
NetD45_K: D45.K R51.1 U15.15 U16.3 | length 2164.2
  Top Layer w50: U16.3@13295,15395 13307,15393 13507,15393 13512,15462 13595,15545 14540,15545 v2(14665,15420)
  Bottom Layer w50: v2(14665,15420) 14668,15423 14778,15423 14905,15550 R51.1@14905,15590 14905,15660 14965,15720 U15.15@14965,15875
NetF1_1: F1.1 P1.3 | length 906.8
  Top Layer w70: P1.3@10885,16575 F1.1@11640,16590 ; F1.1@11611.16,16617.72 cw(c11541.53,16684.63) 11543.45,16588.08 cw(c11545.37,16491.53) F1.1@11612.28,16561.16
NetF2_2: F2.2 U11.1 | length 478.9
  Top Layer w50: F2.2@13260,8246.57 13708.43,8246.57 U11.1@13730,8225
NetF3_2: F3.2 U13.1 | length 394.9
  Top Layer w50: F3.2@13283.43,13040 13445,13040 U13.1@13610,12875
NetF4_2: F4.2 U15.1 | length 683.8
  Top Layer w60: F4.2@12895,15841.57 13531.57,15841.57 U15.1@13565,15875
NetF5_2: F5.2 U1.1 | length 360
  Top Layer w60: F5.2@13420,6296.57 13643.43,6296.57 U1.1@13740,6200
NetF6_2: F6.2 U5.1 | length 461.8
  Top Layer w50: F6.2@13145,10693.43 13566.57,10693.43 U5.1@13595,10665
NetF7_2: F7.2 U8.1 | length 375.5
  Top Layer w50: F7.2@13243.43,14695 13365,14695 13465,14685 U8.1@13610,14635
NetP3_1: P3.1 U17.5 | length 4710.6
  Top Layer w78.74: U17.5@22835.12,6465 22975,6465 23175,6665 23175,7876.97 P3.1@23580,8281.97 ; P3.1@23540.63,8281.97 cw(c23445.58,8281.97) 23512.79,8214.76 cw(c23580,8147.55) P3.1@23580,8242.6
  Bottom Layer w78.74: U17.5@22835.12,6465 22970,6465 23170,6665 23170,7871.97 P3.1@23580,8281.97 ; P3.1@23540.63,8281.97 cw(c23445.58,8281.97) 23512.79,8214.76 cw(c23580,8147.55) P3.1@23580,8242.6
NetP4_1: P4.1 U18.5 | length 4488.6
  Top Layer w78.74: U18.5@22765.12,10070 22925,10070 23160,10305 23160,11271.97 P4.1@23610,11721.97 ; P4.1@23570.63,11721.97 cw(c23475.58,11721.97) 23542.79,11654.76 cw(c23610,11587.55) P4.1@23610,11682.6
  Bottom Layer w78.74: U18.5@22765.12,10070 22920,10070 23160,10310 23160,11275 23606.97,11721.97 P4.1@23610,11721.97 ; 23537.62,11652.62 cw(c23610,11580.23) P4.1@23610,11682.6 ; 23544.93,11659.93 ccw(c23482.9,11721.97) P4.1@23570.63,11721.97
NetP5_1: P5.1 U19.5 | length 3495.8
  Top Layer w78.74: U19.5@22775.12,13930 22895,13930 23200,14235 23200,14676.97 P5.1@23625,15101.97 ; P5.1@23585.63,15101.97 cw(c23490.58,15101.97) 23557.79,15034.76 cw(c23625,14967.55) P5.1@23625,15062.6
  Bottom Layer w78.74: U19.5@22775.12,13930 22910,13930 23200,14220 23200,14676.97 P5.1@23625,15101.97 ; P5.1@23585.63,15101.97 cw(c23490.58,15101.97) 23557.79,15034.76 cw(c23625,14967.55) P5.1@23625,15062.6
NetR1_1: R1.1 U1.11 | length 1092.7
  Top Layer w50: U1.11@14740,6200 14740,5905 15000,5645 R1.1@15430,5645
NetR4_1: R4.1 U1.3 | length 1574
  Bottom Layer w35: R4.1@12725,6890 13375,6890 13940,6325 U1.3@13940,6200
NetR6_1: R6.1 U3.2 | length 251.9
  Top Layer w20: U3.2@12795,6510 12955,6510 R6.1@13020,6445
NetR10_1: R10.1 U5.11 | length 1101.6
  Top Layer w50: U5.11@14595,10665 14595,10530 14835,10290 15005,10240 R10.1@15455,10240
NetR12_1: R12.1 U5.3 | length 961.3
  Top Layer w40: R12.1@13000,10925 13635,10925 13795,10765 U5.3@13795,10665
NetR14_1: R14.1 U7.2 | length 407
  Top Layer w50: U7.2@12910,10070 12975,10070 13185,9860 R14.1@13185,9815
NetR19_1: R19.1 U8.11 | length 1226.1
  Bottom Layer w50: U8.11@14610,14635 14610,14485 14730,14325 14900,14285 14910,14285 15460,14285 R19.1@15560,14385
NetR26_1: R26.1 U8.3 | length 1589.8
  Top Layer w50: R26.1@12380,14785 12420,14835 13705,14835 13810,14720 U8.3@13810,14635
NetR28_1: R28.1 U10.2 | length 343.5
  Bottom Layer w30: U10.2@13075,13945 13140,13945 13195,13890 13195,13820 13245,13770 R28.1@13305,13770
NetR31_1: R31.1 U11.11 | length 647.3
  Top Layer w50: U11.11@14730,8225 14725,7900 R31.1@14940,7660
NetR33_1: R33.1 U11.3 | length 1797.2
  Bottom Layer w30: R33.1@12395,8545 13750,8545 13930,8365 U11.3@13930,8225 ; R33.1@12403.88,8536.12 cw(c12425.32,8514.68) 12425.32,8545 cw(c12425.32,8575.32) R33.1@12403.88,8553.88
NetR36_1: R36.1 U12.2 | length 548.7
  Top Layer w60: U12.2@12305,8185 12520,8185 12710,7995 R36.1@12710,7930
NetR39_1: R39.1 U13.11 | length 1146.3
  Top Layer w50: U13.11@14610,12875 14610,12690 14830,12470 15400,12470 R39.1@15480,12465
NetR41_1: R41.1 U13.3 | length 1293
  Top Layer w40: v2@13770,12605.26 13810,12685 U13.3@13810,12875
  Bottom Layer w40: R41.1@12940,12155 13285,12145 v2@13770,12605.26
  other v2: 13767.58,12600
NetR43_1: R43.1 U14.2 | length 1025.4
  Top Layer w30: U14.2@12860,12580 12800,12580 12710,12490 12710,12170 12870,12010 R43.1@13105,12010 ; R43.1@13094.39,11999.39 ccw(c13068.79,11973.79) 13068.79,12010 ccw(c13068.79,12046.21) R43.1@13094.39,12020.61
NetR46_1: R46.1 U15.11 | length 1060.1
  Top Layer w50: U15.11@14565,15875 14565,15945 14710,16090 R46.1@15495,16090
NetR48_1: R48.1 U15.3 | length 1491.4
  Bottom Layer w50: R48.1@12425,15665 13665,15665 13765,15765 U15.3@13765,15875
NetR50_1: R50.1 U16.2 | length 351.3
  Top Layer w50: U16.2@13295,15295 13365,15295 13525,15135 R50.1@13525,15080
pads on no net: D46. D46.2 D47. D47.2 D48. D48.2 D49. D49.2 D50. D50.2 D51. D51.2 DD1. DD2. DD3. DD4. DD5. DD6. P1.2 P2.2 P3.2 P4.2 P5.2 P9.2 P10.2 Q1. Q2. Q3. Q4. Q5. Q6. U3.1 U3.4 U3.7 U7.1 U7.4 U7.7 U10.1 U10.4 U10.7 U12.1 U12.4 U12.7 U14.1 U14.4 U14.7 U16.1 U16.4 U16.7 U17.2 U17.3 U17.4 U17.6 U17.7 U17.8 U18.2 U18.3 U18.4 U18.6 U18.7 U18.8 U19.2 U19.3 U19.4 U19.6 U19.7 U19.8
copper on no net:
  other v5: 9645.67,5708.66 24015.75,5708.66 9645.67,16535.43 24015.75,16535.43

## Polygon pours and split planes (outlines as drawn)
GND on Top Layer "Top Layer-No Net" (hatched 90Degree grid 15 track 11, remove dead copper, pour order 2): 10240,16715 10360,16835 10525,16835 16255,16835 16370,16720 16390,16700 16390,5570 16390,5550 16280,5440 16245,5405 10370,5405 10370,5415 10285,5500 10240,5545 10240,6210 9610,6210 9525,6295 9440,6380 9440,16085 9440,16110 9505,16175 9515,16185 10170,16185 10170,16720 10185,16735 10290,16840 10490,16840
GND on Bottom Layer "Top Layer-No Net" (hatched 90Degree grid 15 track 11, remove dead copper, pour order 4): 10185,16725 10290,16830 10360,16830 16200,16830 16340,16690 16365,16665 16365,5550 16365,5530 16250,5415 16240,5405 10360,5405 10350,5405 10230,5525 10220,5535 10220,6190 9610,6190 9600,6200 9450,6350 9450,16095 9510,16155 9540,16185 10165,16185

## Keep-outs
Keep-Out Layer:
  lines w10: 9330.71,5314.96 24291.34,5314.96 24291.34,16929.13 9330.71,16929.13 9330.71,5314.96

## Silkscreen, mask and mechanical layers (free items; w line width, h text height)
Top Overlay:
  circle w10: c9645.67,5708.66 r196.85
  circle w10: c9645.67,16535.43 r196.85
  circle w10: c24015.75,16535.43 r196.85
  circle w10: c24015.75,5708.66 r196.85
  circle w30: c11141.3,13390 r128.7
  circle w30: c11656.3,15285 r128.7
  circle w30: c16220,5630 r128.7
  circle w30: c16251.3,10240 r128.7
  circle w30: c16326.3,14380 r128.7
  circle w30: c16195,7645 r128.7
  circle w30: c16255,12450 r128.7
  circle w30: c16225,16075 r128.7
  circle w30: c21940,14935 r128.7
  circle w30: c21445,13030 r128.7
  lines w10: 9350,15159.25 9350,14175 10255.51,14175 ; 9350,15160 10255.51,15160 ; 9355,12200 10260.51,12200 ; 9360,12200 9360,13184.25 ; 9360,13185 10265.51,13185 ; 9640,11504.87 9640,11605 9639.98,11705.13 ; 9740,11504.87 9740,11605 9739.98,11705.13 ; 10255,14175.75 10255,15160 ; 10265,12200.75 10265,13185
  lines w50: 16390,16875 16395,5355
  text "Danger   NO touch  !" at 20150,16865 h118.11 r180
  text "24V" at 11020,16855 h60 r180
  text "GND" at 10530,16845 h60 r180
  text "DC300V-" at 21905,16055 h60
  text "GND" at 9730,16035 h60 r270
  text "DC300V+" at 22870,16030 h60
  text "C-" at 16090,15875 h60
  text "C-" at 23370,15840 h60 r90
  text "TEST" at 16045,15780 h60
  text "15V" at 9745,15590 h60 r270
  text "C+" at 23405,15055 h60 r90
  text "15V" at 11585,15035 h60
  text "DC300V+" at 22110,14990 h60
  text "TEST" at 11585,14925 h60
  text "C+" at 16210,14660 h60
  text "TEST" at 16110,14560 h60
  text "-15V" at 23765,14120 h60 r90
  text "GND" at 9715,14030 h60 r270
  text "OUT" at 23760,13885 h60 r90
  text "+15V" at 23770,13585 h60 r90
  text "5V" at 9710,13570 h60 r270
  text "5V" at 11320,13450 h60
  text "TEST" at 11300,13345 h60
  text "Danger   NO touch  !" at 23210,13280 h100 r90
  text "DC300V-" at 21670,12975 h60
  text "B-" at 16195,12755 h60
  text "TEST" at 16155,12630 h60
  text "B-" at 23310,12400 h60 r90
  text "B+" at 23325,11690 h60 r90
  text "B-" at 16690,11400 h60
  text "TEST" at 16635,11300 h60
  text "B+" at 16195,10490 h60
  text "-15V" at 23800,10445 h60 r90
  text "TEST" at 16095,10400 h60
  text "OUT" at 23795,10210 h60 r90
  text "+15V" at 23805,9910 h60 r90
  text "SDU_SR_DRIVE_1.0" at 9510,9160 h196.85 r270
  text "A-" at 23335,8995 h60 r90
  text "Danger   NO touch  !" at 23165,8520 h196.85 r90
  text "A+" at 23345,8205 h60 r90
  text "A-" at 16150,7910 h60
  text "TEST" at 16105,7825 h60
  text "-15V" at 23775,7170 h60 r90
  text "OUT" at 23770,6935 h60 r90
  text "+15V" at 23780,6635 h60 r90
  text "Danger   NO touch  !" at 10730,5515 h196.85
  text "A+" at 16085,5430 h60
  text "Danger   NO touch  !" at 20785,5410 h157.48
  text "Danger  NO touch !" at 17165,5375 h196.85
  text "TEST" at 16040,5335 h60

## Text inside footprints (layer, text, board x,y; h text height)
CON1: Top Overlay "2" at 9660,9685 h50 r90; Top Overlay "1" at 9760,9705 h50 r90; Top Overlay "35" at 9870.85,11503.24 h50 r90; Top Overlay "36" at 9570.85,11493.24 h50 r90
DD1: Top Overlay "C" at 20715,6600 h60 r180; Top Overlay "A" at 20715,6120 h60 r180
DD2: Top Overlay "C" at 20685,10330 h60 r180; Top Overlay "A" at 20685,9850 h60 r180
DD3: Top Overlay "C" at 20625,14250 h60 r180; Top Overlay "A" at 20625,13770 h60 r180
DD4: Top Overlay "C" at 20715,8440 h60 r180; Top Overlay "A" at 20715,7960 h60 r180
DD5: Top Overlay "C" at 20685,12300 h60 r180; Top Overlay "A" at 20685,11820 h60 r180
DD6: Top Overlay "C" at 20615,16120 h60 r180; Top Overlay "A" at 20615,15640 h60 r180
Q1: Top Overlay "3" at 19820,6570 h60; Top Overlay "2" at 19815,6310 h60; Top Overlay "1" at 19820,6090 h60
Q2: Top Overlay "3" at 19805,10285 h60; Top Overlay "2" at 19800,10025 h60; Top Overlay "1" at 19805,9805 h60
Q3: Top Overlay "3" at 19720,14235 h60; Top Overlay "2" at 19715,13975 h60; Top Overlay "1" at 19720,13755 h60
Q4: Top Overlay "3" at 19820,8430 h60; Top Overlay "2" at 19815,8170 h60; Top Overlay "1" at 19820,7950 h60
Q5: Top Overlay "3" at 19740,12305 h60; Top Overlay "2" at 19735,12045 h60; Top Overlay "1" at 19740,11825 h60
Q6: Top Overlay "3" at 19730,16105 h60; Top Overlay "2" at 19725,15845 h60; Top Overlay "1" at 19730,15625 h60
U1: Top Overlay "16" at 15215,6280 h60; Top Overlay "8" at 14380,6285 h60; Top Overlay "1" at 13730,6290 h60
U2: Top Overlay "1" at 10084.69,14565.16 h59.06 r90; Top Overlay "2" at 10084.68,14755.32 h59.06 r90; Top Overlay "3" at 10084.68,14655.32 h59.06 r90
U4: Top Overlay "1" at 10069.69,12580.16 h59.06 r90; Top Overlay "2" at 10069.68,12770.32 h59.06 r90; Top Overlay "3" at 10069.68,12670.32 h59.06 r90
U5: Top Overlay "1" at 13585,10755 h60; Top Overlay "8" at 14235,10750 h60; Top Overlay "16" at 15070,10745 h60
U8: Top Overlay "16" at 15085,14715 h60; Top Overlay "8" at 14250,14720 h60; Top Overlay "1" at 13600,14725 h60
U11: Top Overlay "1" at 13720,8315 h60; Top Overlay "8" at 14370,8310 h60; Top Overlay "16" at 15205,8305 h60
U13: Top Overlay "16" at 15085,12955 h60; Top Overlay "8" at 14250,12960 h60; Top Overlay "1" at 13600,12965 h60
U15: Top Overlay "16" at 15040,15955 h60; Top Overlay "8" at 14205,15960 h60; Top Overlay "1" at 13555,15965 h60
U17: Top Overlay "O" at 22655,5905 h60 r270; Top Overlay "+" at 22655,6005 h60 r270; Top Overlay "-" at 22655,6115 h60 r270; Top Overlay "8" at 22880,6785 h60 r270; Top Overlay "7" at 22880,6675 h60 r270; Top Overlay "6" at 22875,6585 h60 r270; Top Overlay "5" at 22875,6485 h60 r270; Top Overlay "4" at 22415,6480 h60 r270; Top Overlay "3" at 22415,6575 h60 r270; Top Overlay "2" at 22420,6670 h60 r270; Top Overlay "1" at 22420,6770 h60 r270
U18: Top Overlay "O" at 22585,9510 h60 r270; Top Overlay "+" at 22585,9610 h60 r270; Top Overlay "-" at 22585,9720 h60 r270; Top Overlay "8" at 22810,10390 h60 r270; Top Overlay "7" at 22810,10280 h60 r270; Top Overlay "6" at 22805,10190 h60 r270; Top Overlay "5" at 22805,10090 h60 r270; Top Overlay "4" at 22345,10085 h60 r270; Top Overlay "3" at 22345,10180 h60 r270; Top Overlay "2" at 22350,10275 h60 r270; Top Overlay "1" at 22350,10375 h60 r270
U19: Top Overlay "O" at 22595,13370 h60 r270; Top Overlay "+" at 22595,13470 h60 r270; Top Overlay "-" at 22595,13580 h60 r270; Top Overlay "8" at 22820,14250 h60 r270; Top Overlay "7" at 22820,14140 h60 r270; Top Overlay "6" at 22815,14050 h60 r270; Top Overlay "5" at 22815,13950 h60 r270; Top Overlay "4" at 22355,13945 h60 r270; Top Overlay "3" at 22355,14040 h60 r270; Top Overlay "2" at 22360,14135 h60 r270; Top Overlay "1" at 22360,14235 h60 r270